# Altium PCB HTTT.PcbDoc
Units mil, origin at the board's own origin, x right, y up, seen from the top; angles counter-clockwise.
Board outline 3730.03 x 3540.03 mil, 2 copper layers (Top Layer, Bottom Layer); 17 components, 23 nets, 106 pads, 0 vias.
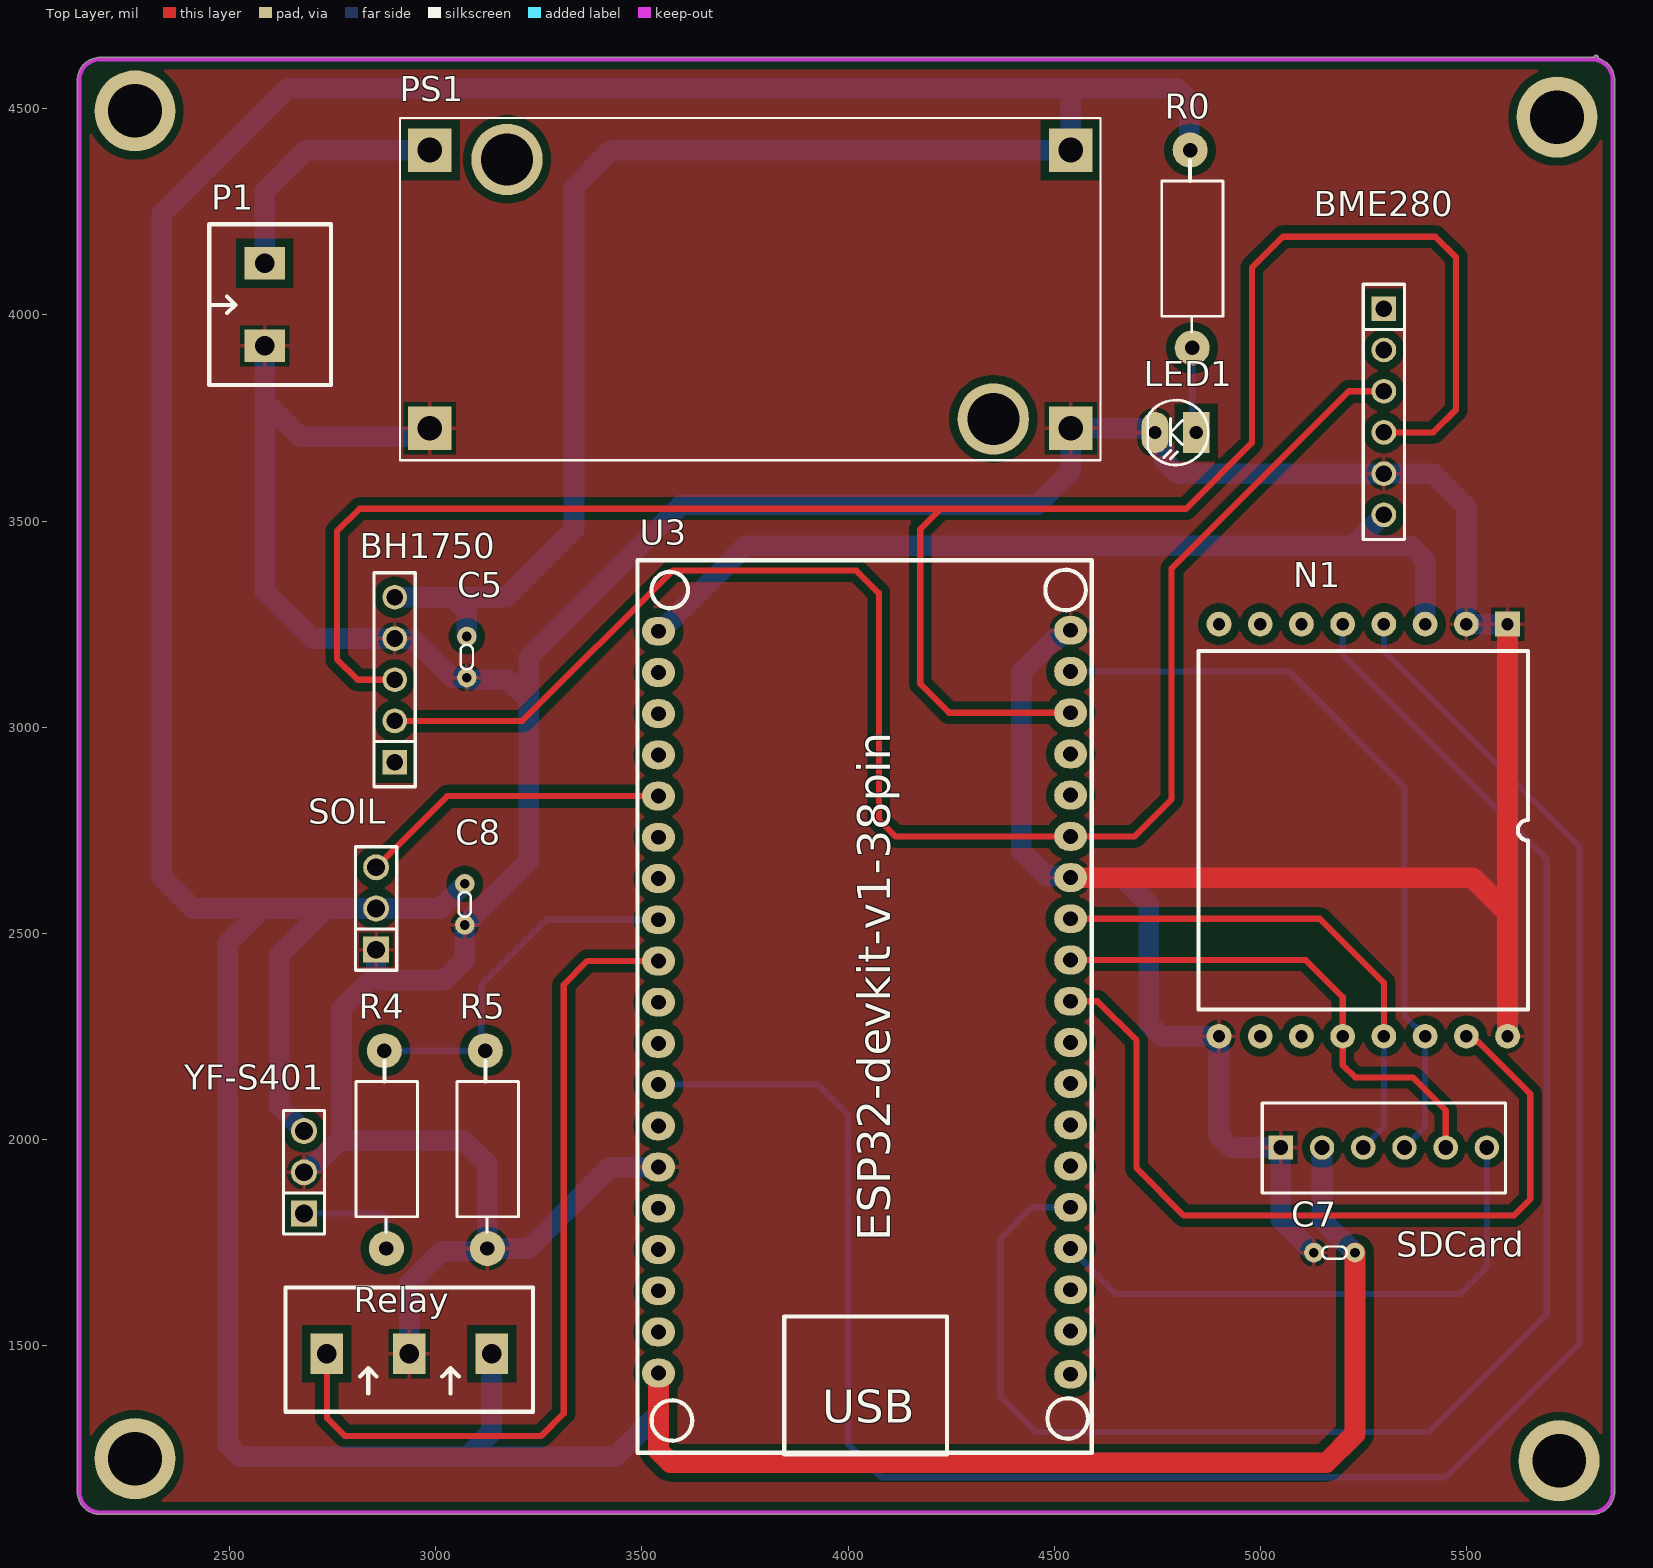
[diagram p0: Top Layer view]
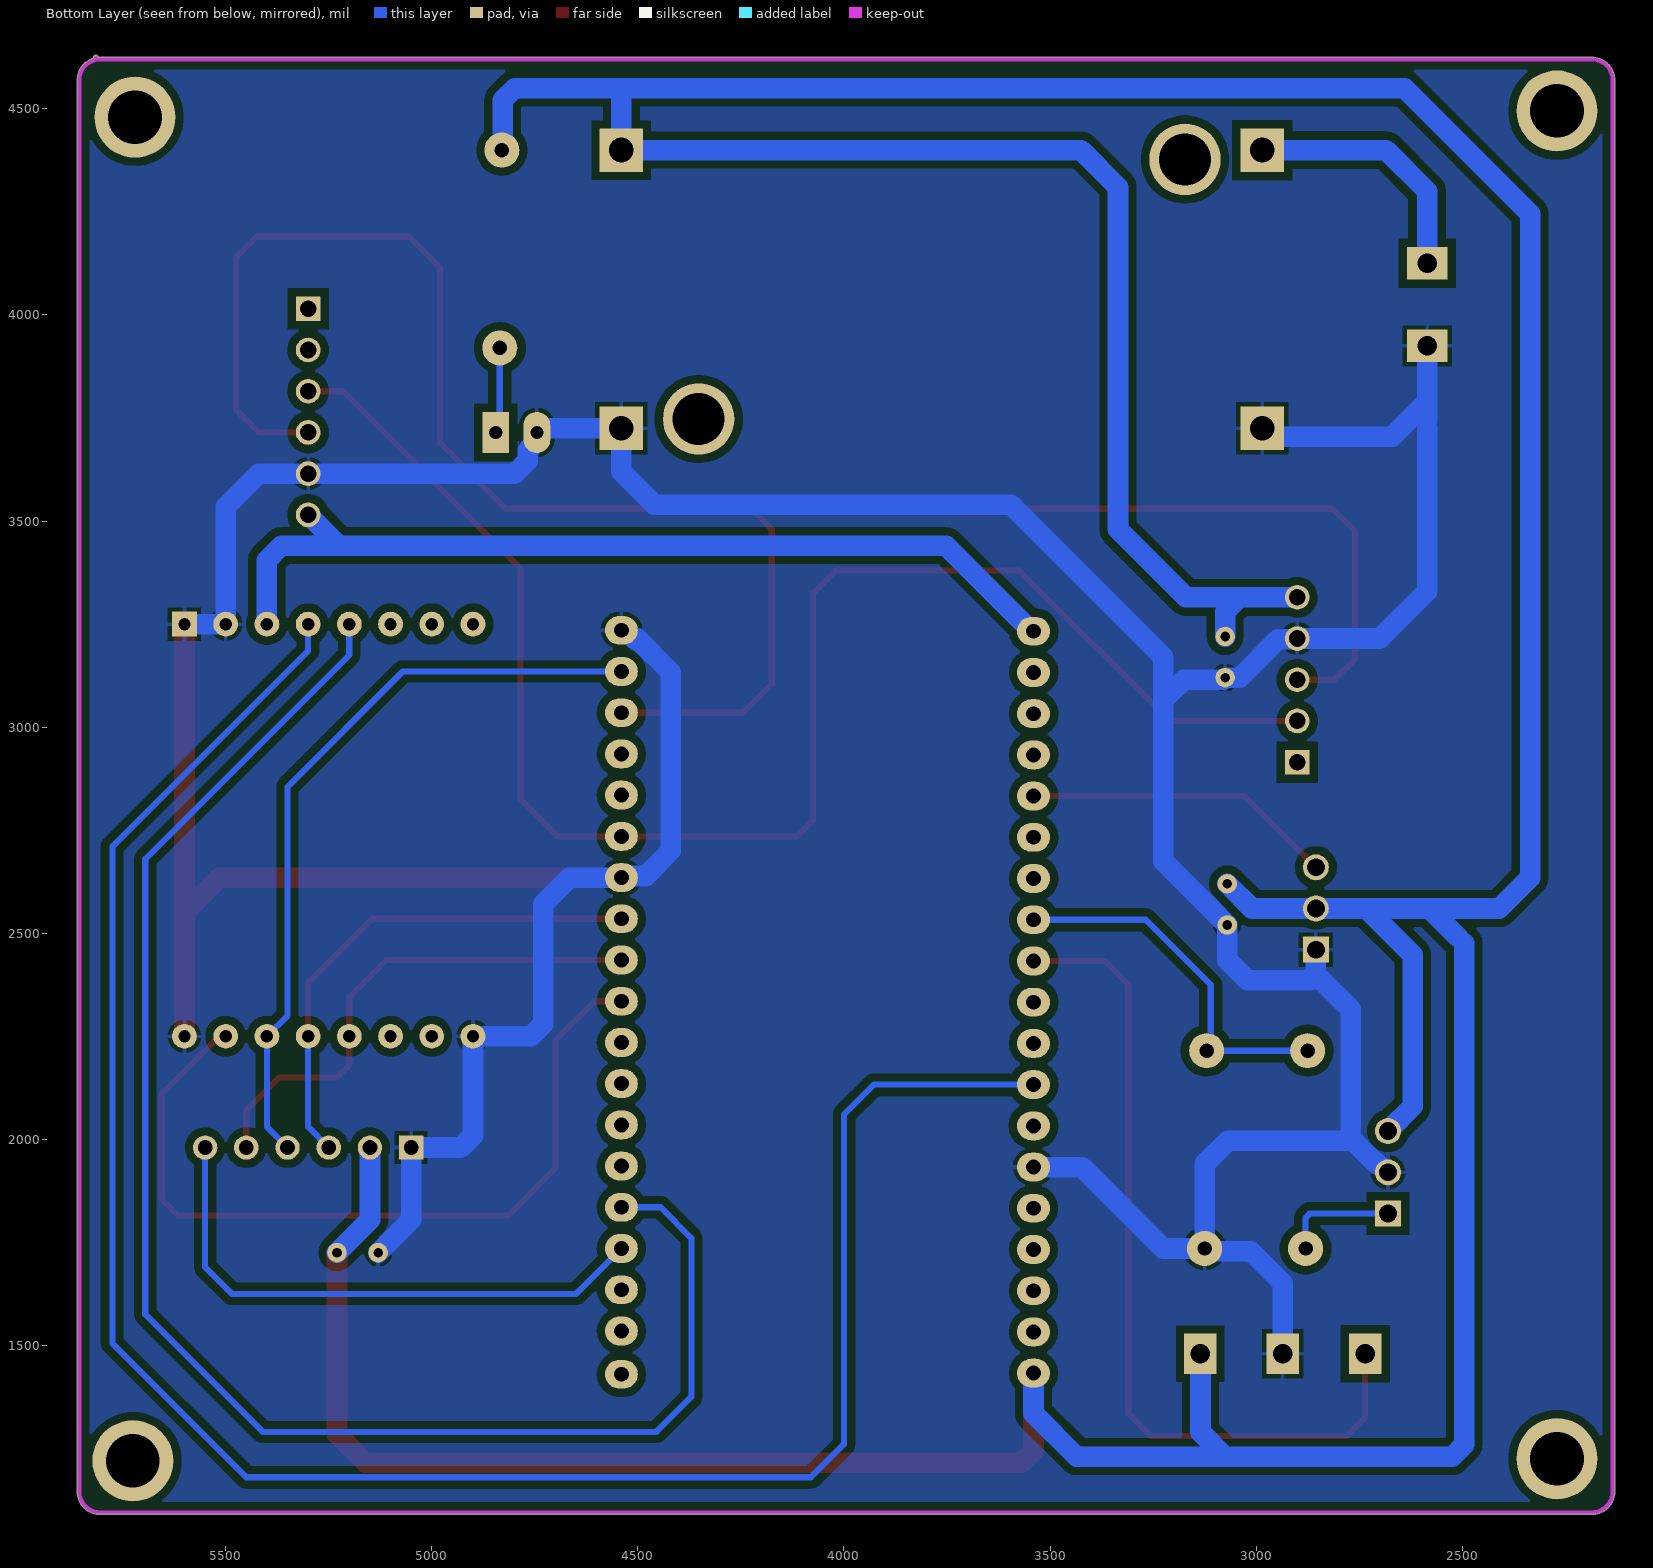
[diagram p1: Bottom Layer view, seen from below]
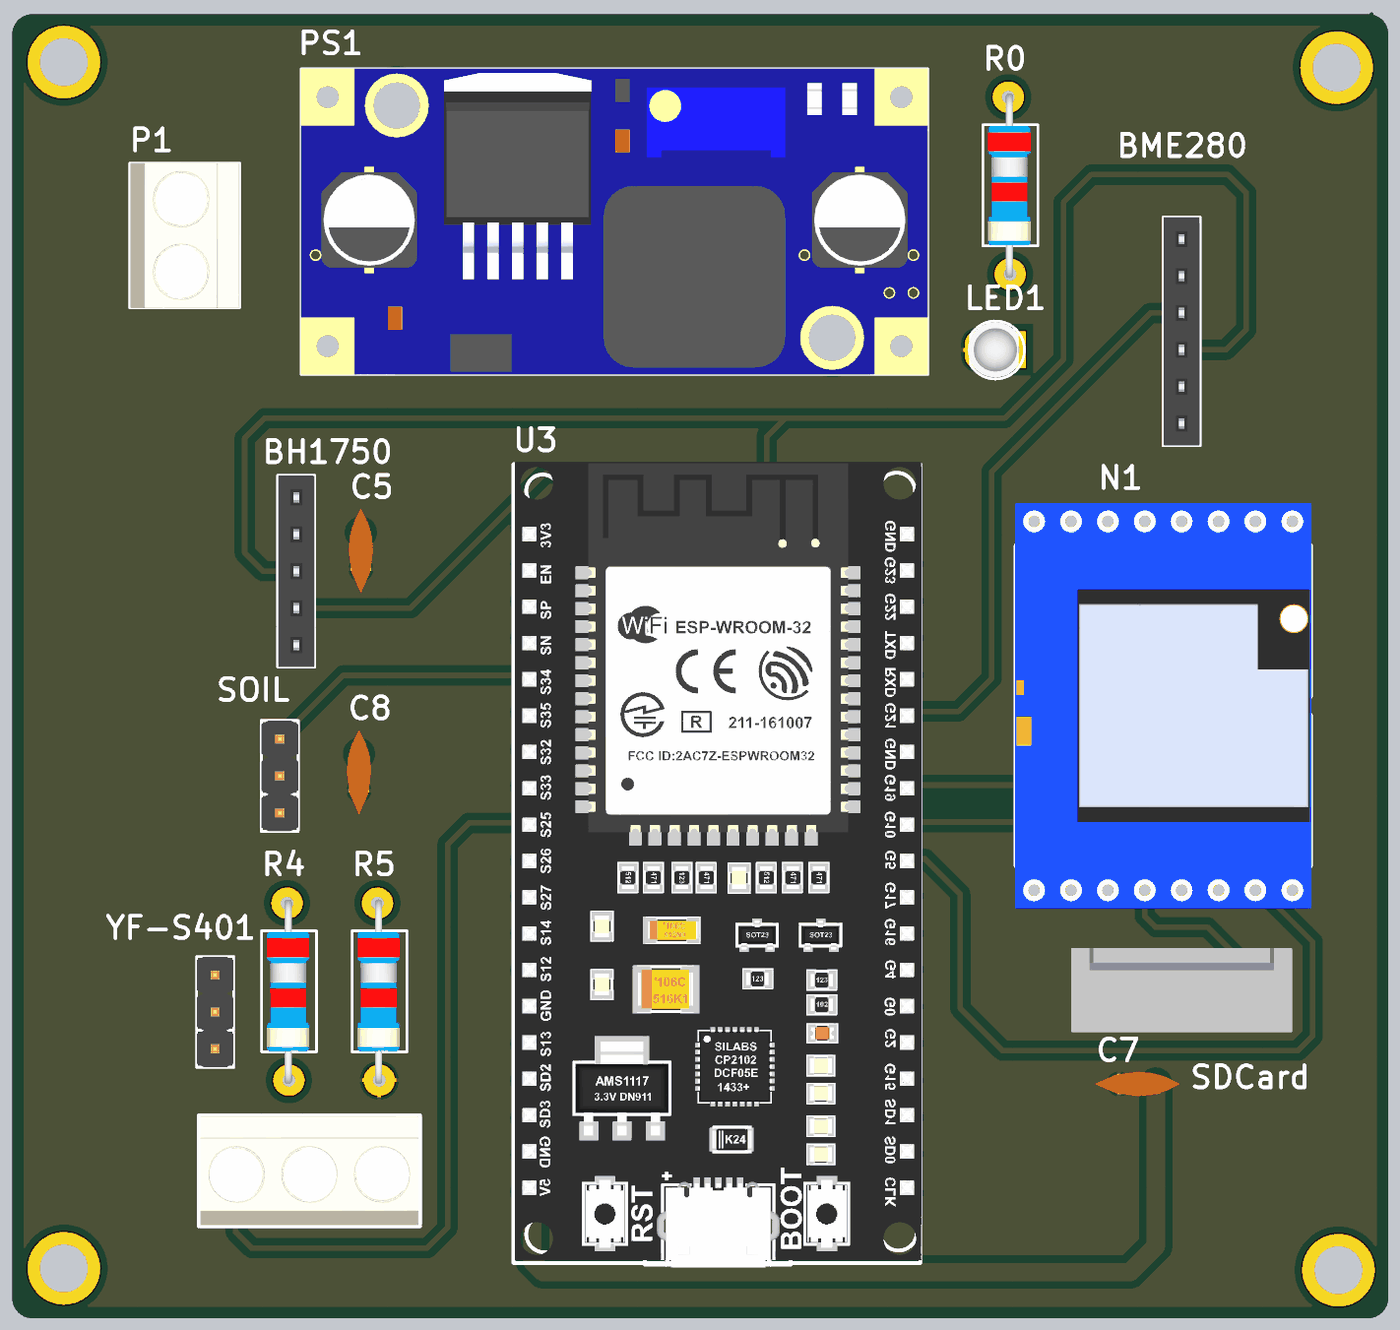
[diagram p2: 3D render of the assembled board from above, using the file's embedded part models]

## Layer stack, top to bottom
Top Solder: solder mask 0.4, Solder Resist, Dk 3.5
Top Layer: signal copper 1.4
Dielectric 1: dielectric 12.6, FR-4, Dk 4.8
Bottom Layer: signal copper 1.4
Bottom Solder: solder mask 0.4, Solder Resist, Dk 3.5

## Board outline
2129.99,1145 ccw(c2185,1145) 2185,1089.98 5805,1089.98 ccw(c5805,1145) 5860.02,1145 5860.02,4570 ccw(c5805,4570) 5819.81,4622.98 ccw(c5810,4625) 5820.02,4625 ccw(c5815,4625) 5809.98,4625.02 2185,4625.02 ccw(c2185,4570) 2129.99,4570

## Design rules (kind name [scope] priority, off if disabled: settings)
Clearance [All] p1: gap=20 ignorepadtopadclearanceinfootprint=FALSE
PolygonConnect [All] p1: connectstyle=Relief reliefconductorwidth=10 reliefentries=4 polygonreliefangle="90 Angle" airgapwidth=10
RoomDefinition Sheet2 [InComponentClass('Sheet2')] p1: confinementstyle=ConfineIn formatcopy=TRUE lockcomponents=FALSE outline 7045,1060 14265,1060 14265,3360 7045,3360
RoutingVias [All] p1: holewidth=28 width=50 viastyle="Through Hole" minholewidth=28 minwidth=50 maxholewidth=28 maxwidth=50
SolderMaskExpansion [All] p1: expansion=4 istentingtop=FALSE
Width [All] p1: maxlimit=50 minlimit=15 preferedwidth=15
30 further rules are at their usual default settings.

## Components (designator, comment, footprint, x,y, rotation, side; value= is the part's Value field where it differs from the comment)
BH1750 "BH1750" JP5-C1T 2900,2915 r90 top
BME280 "BME280" JP6-C1T 5300,4015 r270 top
C5 "Capacitor Ceramic" Tu-pico 3075,3120 r90 top value=104
C7 "Capacitor Ceramic" Tu-pico 5130,1725 r0 top value=104
C8 "Capacitor Ceramic" Tu-pico 3070,2520 r90 top value=104
LED1 "LED" LED-3 4845,3715 r180 top value="LED 3 ly Single Colour"
N1 "SX1278" DIP16 5600,3250 r270 top
P1 "Header 2 - M" "Medium - Header 2" 2585,4025 r90 top
PS1 "Module LM2596" CONV_MC00100 3762.5,4062.5 r0 top
R0 "510" RES-1/2W 4835,4180 r270 top
R4 "4.7K" RES-1/2W 2880,1995 r270 top
R5 "10K" RES-1/2W 3125,1995 r270 top
Relay "Header 3 - M" "Medium - Header 3" 2735.5,1480 r0 top
SDCard "Header6" HDR6 5050,1980 r0 top
SOIL "SOIL" JP3-D1T 2855,2460 r90 top
U3 "ESP32-DEVKI-V1.0-PIN38" ESP32-DEVKIT-V1.0-38PIN 4040,2320.09 r0 top
YF-S401 "YS-S401" JP3-D1T 2680,1820 r90 top

## Footprints (in the part's own frame and the unit in brackets; to place one, negate y for a bottom-side part, rotate by r counter-clockwise, add the part's x,y. Pads: shape width x height; smd on the part's side, far side on the other; paste and mask are expansions set on the pad)
CONV_MC00100 [mil]
  rect 105.63x105.63 / inner round 105.63 / far side rect 105.63x105.63 hole 60 mask+4.02: IN+(-777.5,337.5) IN-(-777.5,-337.5) OUT+(777.5,337.5) OUT-(777.5,-337.5)
  round 173.23 hole 125.98 mask+4.02: MH1(-590,315) MH2(590,-315)
  silkscreen extent -850,-415 850,415, body extent -850,-415 850,415, height 551
DIP16 [mil]
  rect 60x60 hole 30: 1(0,0)
  round 60 hole 30: 2(0,-100) 3(0,-200) 4(0,-300) 5(0,-400) 6(0,-500) 7(0,-600) 8(0,-700) 9(1000,-700) 10(1000,-600) 11(1000,-500) 12(1000,-400) 13(1000,-300) 14(1000,-200) 15(1000,-100) 16(1000,0)
  silkscreen extent 65,-750 935,50, body extent -49,-752 1049,52, height 177
ESP32-DEVKIT-V1.0-38PIN [mil] "DEVKIT 38 PIN"
  oval 80x70 hole 36: 1(-500,912.59) 2(-500,812.59) 3(-500,712.59) 4(-500,612.59) 5(-500,512.59) 6(-500,412.59) 7(-500,312.59) 8(-500,212.59) 9(-500,112.59) 10(-500,12.59) 11(-500,-87.41) 12(-500,-187.41) 13(-500,-287.41) 14(-500,-387.41) 15(-500,-487.41) 16(-500,-587.41) 17(-500,-687.41) 18(-500,-787.41) 19(-500,-887.41) 20(500,-890.09) 21(500,-785.09) 22(500,-685.09) 23(500,-585.09) 24(500,-485.09) 25(500,-385.09) 26(500,-285.09) 27(500,-185.09) 28(500,-85.09) 29(500,14.91) 30(500,114.91) 31(500,214.91) 32(500,314.91) 33(500,414.91) 34(500,514.91) 35(500,614.91) 36(500,714.91) 37(500,814.91) 38(500,914.91)
  silkscreen extent -551,-1085 551,1085, body extent -547,-1092 555,1092, height 269
HDR6 [mm] "Connector; Header; 6 Position"
  rect 1.5x1.5 hole 0.9: 1(0,0)
  round 1.5 hole 0.9: 2(2.54,0) 3(5.08,0) 4(7.62,0) 5(10.16,0) 6(12.7,0)
  silkscreen extent -1.14,-2.79 13.84,2.74, body extent -1.27,-2.92 13.97,2.88, height 11.72
JP3-D1T [mm] "3 pins, 1 row, straight, gold plating"
  rect 1.6x1.6 hole 1.1: 1(0,0)
  round 1.6 hole 1.1: 2(2.54,0) 3(5.08,0)
  silkscreen extent -1.27,-1.27 6.35,1.27, body extent -1.27,-1.27 6.35,1.27, height 8.54
JP5-C1T [mm] "5 row, straight, gold plating"
  rect 1.52x1.52 hole 1.02: 1(0,0)
  round 1.52 hole 1.02: 2(2.54,0) 3(5.08,0) 4(7.62,0) 5(10.16,0)
  silkscreen extent -1.52,-1.27 11.68,1.27, body extent -1.52,-1.25 11.68,1.25, height 8.51
JP6-C1T [mm] "6 row, straight, gold plating"
  rect 1.52x1.52 hole 1.02: 1(0,0)
  round 1.52 hole 1.02: 2(2.54,0) 3(5.08,0) 4(7.62,0) 5(10.16,0) 6(12.7,0)
  silkscreen extent -1.52,-1.27 14.22,1.27, body extent -1.52,-1.25 14.22,1.25, height 8.51
LED-3 [mil] "LED 2 PIN, 3ly Only colour"
  rect 65x100 hole 32: 1(0,0)
  oval 65x100 hole 32: 2(100,0)
  silkscreen extent -29,-78 118,79, body extent -13,-75 125,75, height 217
"Medium - Header 2" [mm]
  rect 2x2.5 hole 1.2: 1(-2.54,0) 2(2.54,0)
  silkscreen extent -4.95,-4.08 4.95,3.43, body extent -5,-4.07 5,3.43, height 10
"Medium - Header 3" [mm]
  rect 2x2.5 hole 1.2: 1(0,0) 2(5.08,0) 3(10.147,0)
  silkscreen extent -2.54,-3.58 12.7,4.06, body extent -2.42,-3.51 12.58,3.99, height 10
RES-1/2W [mil]
  round 85 hole 35: 1(-220,-5) 2(260,0)
  silkscreen extent -195,-74 221,75, body extent -230,-60 270,56, height 121
Tu-pico [mm] "Tu gom mini"
  round 1.2 hole 0.6: 1(0,0) 2(2.54,0)
  silkscreen extent 0.51,-0.38 2.03,0.38, body extent -1.65,-0.85 4.19,0.85, height 6.12

## Part data
BH1750: library part JP5, "WR-PHD 2.54 mm Angled Socket Header", Manufacturer="W¨¹rth Elektronik eiSos GmbH", partNo=613005143121, ComponentLink1 Description=Manufacturer, ComponentLink1URL=http://www.we-online.com, ComponentLink2 Description=Datasheet, ComponentLink2URL=http://katalog.we-online.de/em/datasheet/6130xx143121.pdf, Created by="Karrer Zheng", Created Date="29 March 2013", NoPins=05
BME280: library part JP6, "WR-PHD 2.54 mm Angled Socket Header", Manufacturer="W¨¹rth Elektronik eiSos GmbH", partNo=613006143121, ComponentLink1 Description=Manufacturer, ComponentLink1URL=http://www.we-online.com, ComponentLink2 Description=Datasheet, ComponentLink2URL=http://katalog.we-online.de/em/datasheet/6130xx143121.pdf, Created by="Karrer Zheng", Created Date="29 March 2013", NoPins=06
C5 C7 C8: library part CapCeramic, "Capacitor", LatestRevisionDate=17-Jul-2002, LatestRevisionNote="Re-released for DXP Platform.", PackageReference=RAD-0.3, Published=8-Jun-2000, Publisher="Altium Limited"
LED1: "LED Single colour Green and Red"
P1: "Header, 2-Pin, Medium", LatestRevisionDate=17-Jul-2002, LatestRevisionNote="Re-released for DXP Platform.", Publisher="Altium Limited"
PS1: library part MC00100, "DC-DC LM2596 Step Down Adjustable Converter Power Supply Module 1.3V-35V", Package=None, Check_prices=https://www.snapeda.com/parts/MC00100/YKS/view-part/?ref=eda, MF=YKS, MP=MC00100, SnapEDA_Link=https://www.snapeda.com/parts/MC00100/YKS/view-part/?ref=snap
R0 R4 R5: library part Res, "Res", Manufacturer="Generic Components", Class=Passive, Published=08/06/2000, Publisher="Altium Hobart Technology Centre", SubClass=R
Relay: "Header, 3-Pin, Medium", LatestRevisionDate=17-Jul-2002, LatestRevisionNote="Re-released for DXP Platform.", Publisher="Altium Limited"
SDCard: "Header IDC, 6 x 1 Pin Vertical 2.54mm Pitch (Non-Boxed, Male)", Manufacturer="W¨¹rth Elektronik eiSos GmbH", partNo=613002143121, ComponentLink1 Description=Manufacturer, ComponentLink1URL=http://www.we-online.com, ComponentLink2 Description=Datasheet, ComponentLink2URL=http://katalog.we-online.de/em/datasheet/6130xx143121.pdf, Created by="Karrer Zheng", Created Date="29 March 2013", NoPins=02
SOIL YF-S401: library part JP3, "WR-PHD 2.54 mm Angled Socket Header", Manufacturer="W¨¹rth Elektronik eiSos GmbH", partNo=613003143121, ComponentLink1 Description=Manufacturer, ComponentLink1URL=http://www.we-online.com, ComponentLink2 Description=Datasheet, ComponentLink2URL=http://katalog.we-online.de/em/datasheet/6130xx143121.pdf, Created by="Karrer Zheng", Created Date="29 March 2013", NoPins=03

## Free pads (board coordinates)
  round 196.85 hole 129.92: 2(2270,4495) 3(5720,4480) 4(2270,1225) 5(5725,1220)

## Nets (pads, with @x,y where several pads share a name; then routed paths per layer and width w, separated by ;. In a path a pad name is that pad's centre, name@x,y a point inside that pad or via, vN(x,y) a via of type N, cw(c..) or ccw(c..) an arc to the next point about the centre after c; other vN are vias at no path point)
3.3V: BME280.6 N1.3 U3.1 | length 2221.4
  Bottom Layer w50: U3.1 3545,3232.68 3752.32,3440 5225,3440 ; BME280.6 5225,3440 ; N1.3 5400,3405 5365,3440 5225,3440
+5: BH1750.5 C5.2 C7.2 C8.2 PS1.OUT+ R0.1 Relay.3 SDCard.2 SOIL.2 U3.19 YF-S401.3 | length 14017
  Top Layer w50: U3.19 3540,1244.29 3569.29,1215 5160,1215 5230,1285 C7.2
  Bottom Layer w50: 2495,2475 2495,1259.29 2524.29,1230 3075,1230 ; 2510,2490 2580,2560 ; YF-S401.3 2620,2080 2620,2447.21 2732.79,2560 ; BH1750.5 3040,3315 ; C8.2 3010,2560 SOIL.2 2732.79,2560 ; C5.2 3075,3280 3040,3315 ; Relay.3 3135,1290 3075,1230 ; U3.19 3540,1335 3435,1230 3075,1230 ; 4540,4530.71 PS1.OUT+ 3425,4400 3335,4310 3335,3480 3170,3315 3040,3315 ; R0.1 4828.21,4401.79 4828.21,4520.71 4798.92,4550 2640,4550 2335,4245 2335,2635 2410,2560 2580,2560 ; SDCard.2 5150,1805 C7.2 ; 2580,2560 2732.79,2560
+12: P1.2 PS1.IN+ | length 616.4
  Bottom Layer w50: P1.2 2585,4300 2685,4400 PS1.IN+
AD0: SOIL.3 U3.5 | length 756.5
  Top Layer w15: SOIL.3 3027.68,2832.68 U3.5
CS: SDCard.6 U3.23 | length 1372.5
  Bottom Layer w15: U3.23 4650,1625 5485,1625 5550,1690 SDCard.6
DIO0: N1.5 U3.24 | length 3944.4
  Bottom Layer w15: U3.24 4445,1835 4370,1760 4370,1375 4455,1290 5410,1290 5695,1575 5695,2680 5200,3175 N1.5
DIO1: N1.6
DIO2: N1.7
DIO3: N1.8
DIO4: N1.10
DIO5: N1.11
GND: BH1750.4 BME280.5 C5.1 C7.1 C8.1 LED1.2 N1.1 N1.2 N1.9 N1.16 P1.1 PS1.IN- PS1.OUT- R5.2 Relay.2 SDCard.1 SOIL.1 U3.14 U3.32 U3.38 YF-S401.2 | length 12182.1
  Top Layer w50: U3.32 5515,2635 5595,2555 5600,2555 ; N1.16 5600,2555 ; N1.1 5600,2555
  Bottom Layer w50: 2585,3725 2585,3330 2700,3215 BH1750.4@2902.66,3215 ; 2585,3745 2585,3790 ; P1.1 2585,3790 ; YF-S401.2 2683.52,1920 2707.02,1943.5 2711.69,1943.5 2765,1996.82 3068.18,1996.82 3125,1940 R5.2 ; 2770,1996.82 2770,2315 2855,2400 ; SOIL.1 2855,2400 ; BH1750.4 2901.69,3213.31 2946.69,3213.31 3040,3120 C5.1 3080,3115 3175,3115 3225,3065 ; Relay.2 2935.5,1650.5 3013.3,1728.3 3118.3,1728.3 R5.2 ; PS1.IN- 2965,3705 2670,3705 2585,3790 ; U3.14 3422.68,1932.67 3225,1735 R5.2 ; U3.38 4529.59,3235 4509.59,3215 4501.86,3215 4420,3133.14 4420,2700 4481.17,2638.83 4536.17,2638.83 U3.32 4665,2635 4730,2570 4730,2279.29 4759.29,2250 N1.9 4900,2009.29 4929.29,1980 SDCard.1 5050,1805 C7.1 ; N1.1 N1.2 5500,3535 5420,3615 BME280.5 4798.86,3615 4767.5,3646.36 4767.5,3670.94 4745,3693.44 LED1.2 4745,3718.07 4738.07,3725 PS1.OUT- 4540,3620 4460,3540 3595,3540 3225,3170 3225,3065 ; 2855,2400 2869.29,2385.71 3020.71,2385.71 3070,2435 C8.1 3225,2675 3225,3065
IN: Relay.1 U3.9 | length 2065.1
  Top Layer w15: Relay.1 2735.5,1324.5 2780,1280 3255,1280 3310,1335 3310,2375 3367.68,2432.68 U3.9
MISO: N1.13 SDCard.3 U3.31 | length 1244.9
  Top Layer w15: U3.31 5145,2535 5300,2380 N1.13
  Bottom Layer w15: SDCard.3 5300,2030 N1.13
MOSI: N1.14 SDCard.4 U3.37 | length 1842.4
  Bottom Layer w15: U3.37 5070,3135 5350,2855 5350,2300 N1.14 5400,2030 SDCard.4
NetLED1_1: LED1.1 R0.2 | length 209.1
  Bottom Layer w15: R0.2 4835,3725 LED1.1
NetR4_2: R4.2 YF-S401.1 | length 279.1
  Bottom Layer w15: YF-S401.1 2870,1820 2880,1810 R4.2
NSS: N1.15 U3.29 | length 1996.5
  Top Layer w15: U3.29 4605,2335 4700,2240 4700,1930 4815,1815 5615,1815 5655,1855 5655,2110 5529.62,2235.38 5526.8,2235.38 5512.18,2250 N1.15
RST: N1.4 U3.12 | length 5174.6
  Bottom Layer w15: U3.12 3927.32,2132.68 4000,2060 4000,1260 4080,1180 5450,1180 5775,1505 5775,2710 5300,3185 N1.4
SCK: N1.12 SDCard.5 U3.30 | length 1259.8
  Top Layer w15: U3.30 5110,2435 5200,2345 N1.12 5200,2180 5230,2150 5370,2150 5450,2070 SDCard.5 SDCard.5@5441.57,1988.43
SCL: BH1750.3 BME280.4 U3.36 | length 5159
  Top Layer w15: BH1750.3 2810,3115 2760,3165 2760,3475 2815,3530 4225,3530 ; U3.36 4245,3035 4175,3105 4175,3480 4225,3530 ; BME280.4 5420,3715 5475,3770 5475,4140 5425,4190 5055,4190 4980,4115 4980,3690 4820,3530 4225,3530
SDA: BH1750.2 BME280.3 U3.33 | length 3915.9
  Top Layer w15: BH1750.2 3210,3015 3575,3380 4020,3380 4075,3325 4075,2775 4115,2735 U3.33 4695,2735 4785,2825 4785,3385 5215,3815 BME280.3
W: R4.1 R5.1 U3.8 | length 904.5
  Bottom Layer w15: R4.1 R5.1 3110,2225 3110,2375 3267.68,2532.68 U3.8
pads on no net: BH1750.1 BME280.1 BME280.2 PS1.MH1 PS1.MH2 U3.2 U3.3 U3.4 U3.6 U3.7 U3.10 U3.11 U3.13 U3.15 U3.16 U3.17 U3.18 U3.20 U3.21 U3.22 U3.25 U3.26 U3.27 U3.28 U3.34 U3.35

## Polygon pours and split planes (outlines as drawn)
GND on Bottom Layer "GND_L02_P000" (solid, remove dead copper, pour order 0): 2150,4625 2130,4605 2130,1135 2180,1085 5820,1085 5860,1125 5860,4585 5815,4630 5810,4625
GND on Top Layer "GND_L01_P001" (solid, remove dead copper, pour order 1): 2145,4605 2145,1160 2135,1150 2185,1100 5815,1100 5860,1145 5860,4580 5810,4630 2170,4630

## Keep-outs
Keep-Out Layer:
  lines w10: 2210,4620 5810,4620 ccw(c5810,4625) 5815,4625 ; 2235,4620 2185,4620 ccw(c2185,4570) 2135,4570 2135,1145 ccw(c2185,1145) 2185,1095 5805,1095 ccw(c5805,1145) 5855,1145 5855,4570 ccw(c5805,4570) 5805,4620

## Text inside footprints (layer, text, board x,y; h text height)
PS1: Mechanical 13 "OUT+" at 4412.11,4279.04 h50; Mechanical 13 "OUT-" at 4431.79,3796.75 h50; Mechanical 13 "IN-" at 2935.73,3796.75 h50; Mechanical 13 "IN+" at 2935.73,4279.04 h50
U3: Top Overlay "USB" at 3937.64,1312.67 h80; Top Overlay "ESP32-devkit-v1-38pin" at 4102.64,1752.67 h80 r90